# Altium PCB STM8SHEILD_LAM_LAI.PcbDoc
Units mm, origin at the board's own origin, x right, y up, seen from the top; angles counter-clockwise.
Board outline 91.95 x 45.72 mm, 2 copper layers (Top Layer, Bottom Layer); 8 components, 17 nets, 87 pads, 0 vias.
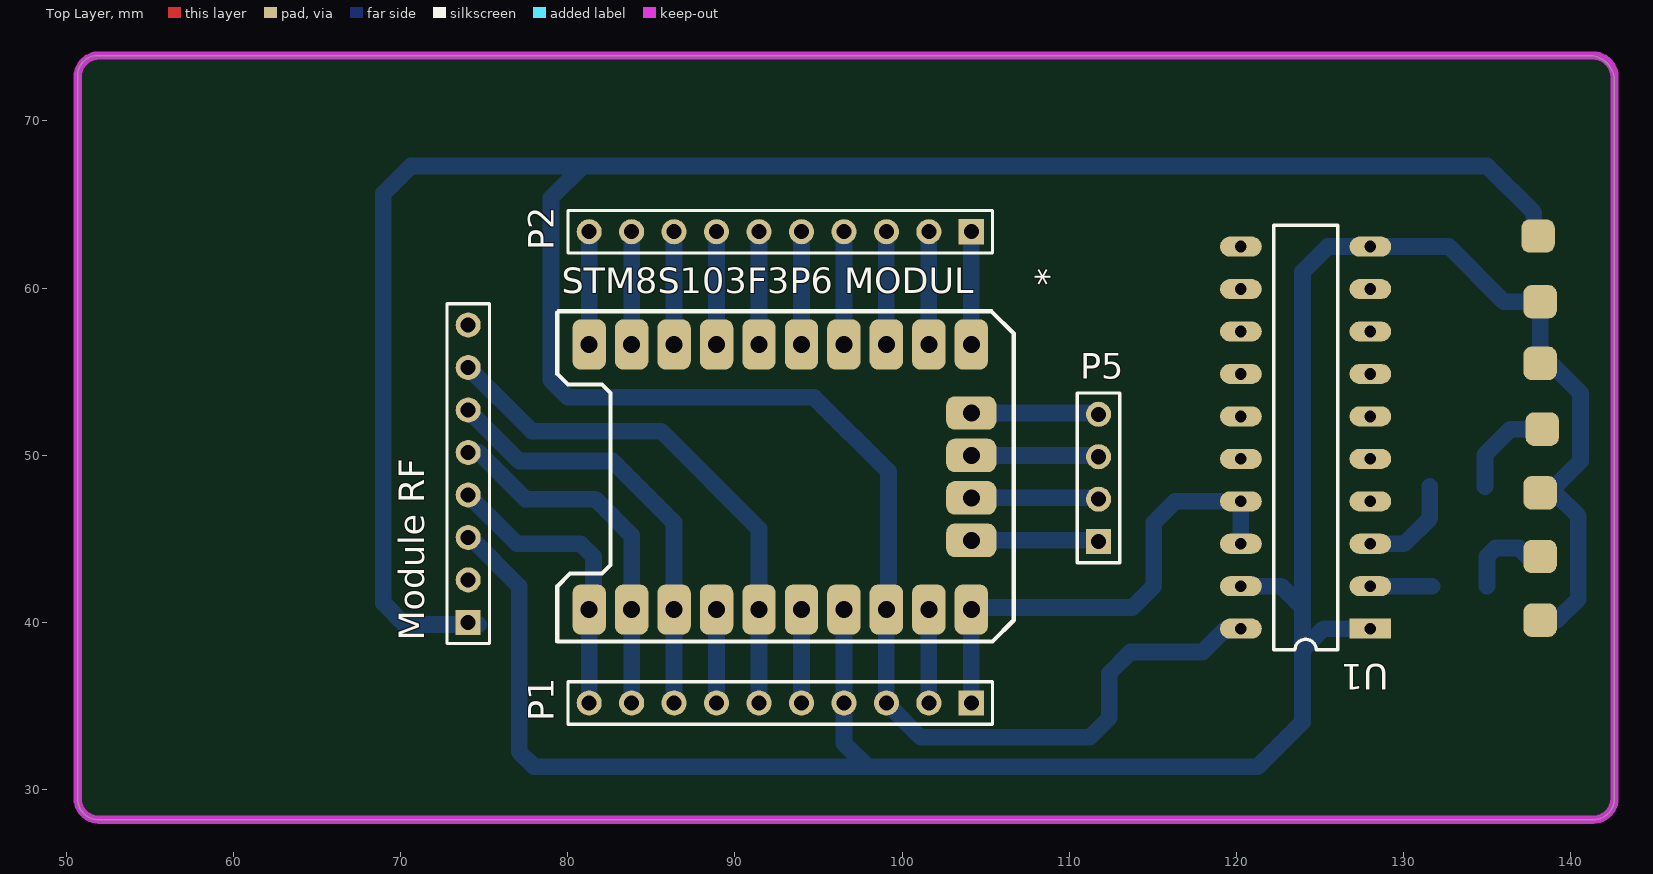
[diagram p0: Top Layer view]
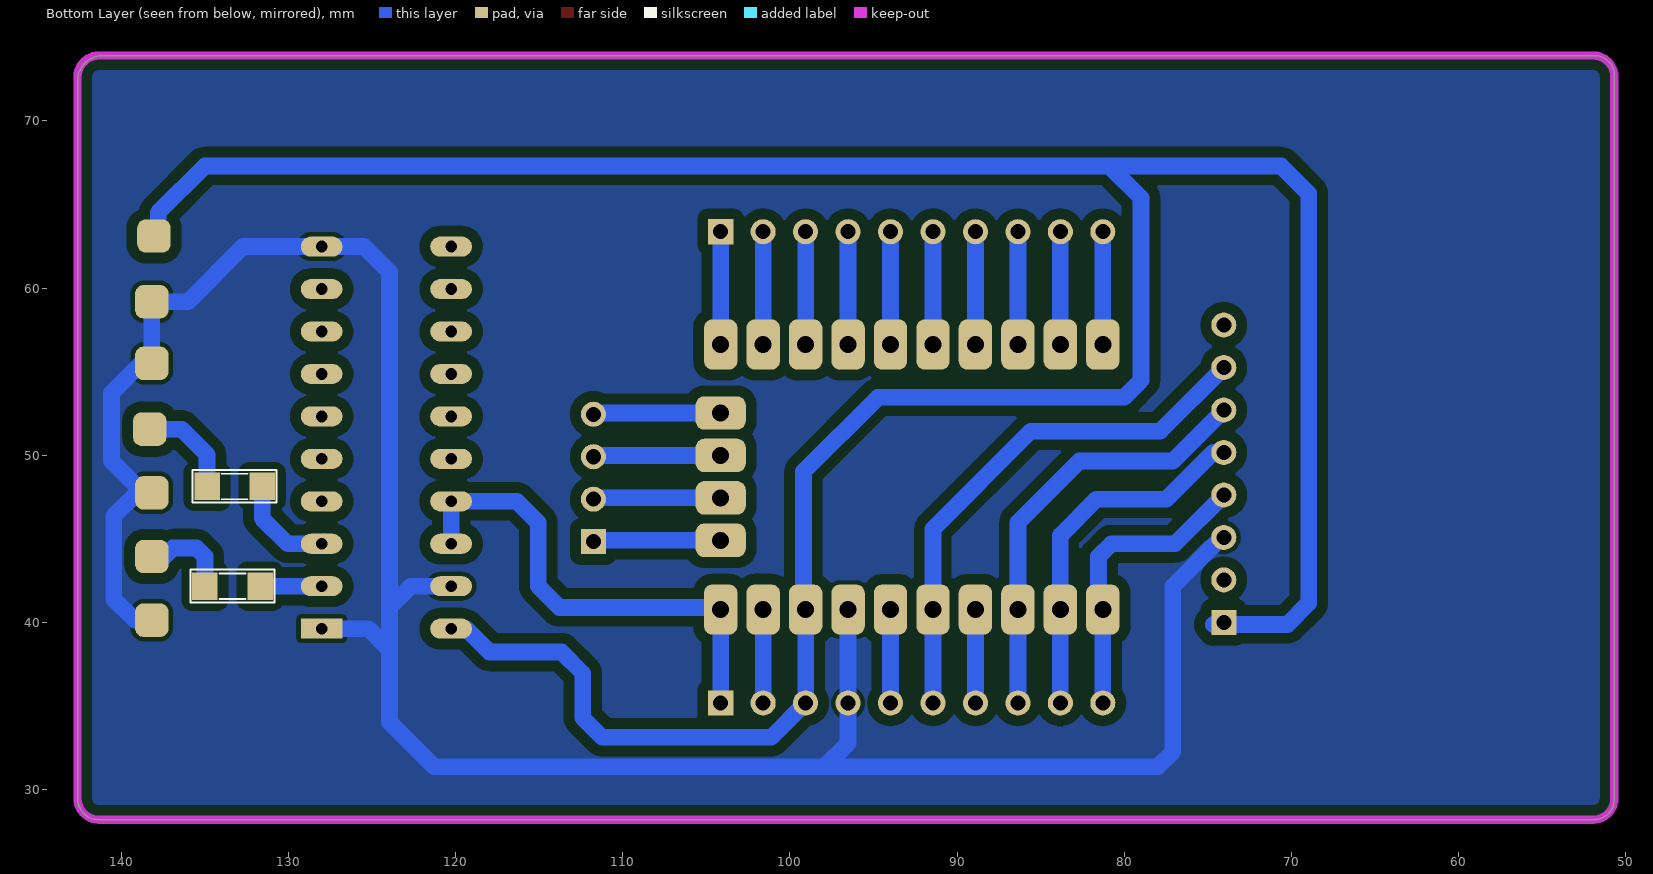
[diagram p1: Bottom Layer view, seen from below]

## Layer stack, top to bottom
Top Solder: solder mask 0.0102, Solder Resist, Dk 3.5
Top Layer: signal copper 0.0356
Dielectric 1: dielectric 0.32, FR-4, Dk 4.8
Bottom Layer: signal copper 0.0356
Bottom Solder: solder mask 0.0102, Solder Resist, Dk 3.5

## Board outline
142.621,72.39 ccw(c141.097,72.39) 141.097,73.914 51.816,73.914 ccw(c51.879,72.708) 50.673,72.644 50.673,29.591 ccw(c51.943,29.464) 51.816,28.194 141.351,28.194 ccw(c141.351,29.464) 142.621,29.464

## Design rules (kind name [scope] priority, off if disabled: settings)
Clearance [All] p1: gap=0.635 ignorepadtopadclearanceinfootprint=FALSE
PolygonConnect [All] p1: connectstyle=Relief reliefconductorwidth=0.254 reliefentries=4 polygonreliefangle="90 Angle" airgapwidth=0.254
RoutingVias [All] p1: holewidth=0.711 width=1.27 viastyle="Through Hole" minholewidth=0.711 minwidth=1.27 maxholewidth=0.711 maxwidth=1.27
ShortCircuit [All] p1: allowed=TRUE
SolderMaskExpansion [All] p1: expansion=0.102
Width [All] p1: maxlimit=1 minlimit=0.254 preferedwidth=1 toplayer_maxwidth=0.254 toplayer_prefwidth=0.254 bottomlayer_minwidth=1 minimp=50.000000 maximp=50.000000 favimp=50.000000
29 further rules are at their usual default settings.

## Classes and differential pairs
component class STM8SBOARDSHIELD: * P1 P2 P5 U1 U7

## Components (designator, comment, footprint, x,y, rotation, side; value= is the part's Value field where it differs from the comment)
* "STM" STM8S103F3P6 81.28,40.767 r0 top
"Module RF" "Comment" HDR1X8 74.041,40.005 r90 top
P1 "Header 10" HDR1X10 104.14,35.179 r180 top
P2 "Header 10" HDR1X10 104.14,63.373 r180 top
P5 "Header 4" HDR1X4 111.76,44.831 r90 top
U1 "74HC245" 74HC245 128.143,39.624 r180 top
? "Comment" SM-1206 133.223,48.133 r180 bottom
? "Comment" SM-1206 133.35,42.164 r180 bottom

## Footprints (in the part's own frame and the unit in brackets; to place one, negate y for a bottom-side part, rotate by r counter-clockwise, add the part's x,y. Pads: shape width x height; smd on the part's side, far side on the other; paste and mask are expansions set on the pad)
74HC245 [mm] "74HC245"
  rect 2.5x1.2 hole 0.7: 1(0.127,0)
  oval 2.5x1.2 hole 0.7: 2(0.127,-2.54) 3(0.127,-5.08) 4(0.127,-7.62) 5(0.127,-10.16) 6(0.127,-12.7) 7(0.127,-15.24) 8(0.127,-17.78) 9(0.127,-20.32) 10(0.127,-22.86) 11(7.874,-22.86) 12(7.874,-20.32) 13(7.874,-17.78) 14(7.874,-15.24) 15(7.874,-12.7) 16(7.874,-10.16) 17(7.874,-7.62) 18(7.874,-5.08) 19(7.874,-2.54) 20(7.874,0)
  silkscreen extent 2.08,-24.13 5.91,1.27, body extent 0.18,-24.26 7.94,1.34, height 4.5
HDR1X4 [mm] "Connector; Header; 4 Position"
  rect 1.5x1.5 hole 0.9: 1(0,0)
  round 1.5 hole 0.9: 2(2.54,0) 3(5.08,0) 4(7.62,0)
  silkscreen extent -1.27,-1.27 8.89,1.27
HDR1X8 [mm] "Connector; Header; 8 Position"
  rect 1.5x1.5 hole 0.9: 1(0,0)
  round 1.5 hole 0.9: 2(2.54,0) 3(5.08,0) 4(7.62,0) 5(10.16,0) 6(12.7,0) 7(15.24,0) 8(17.78,0)
  silkscreen extent -1.27,-1.27 19.05,1.27, body extent -1.27,-1.27 19.05,1.27, height 7
HDR1X10 [mm] "Connector; Header; 10 Position"
  rect 1.5x1.5 hole 0.9: 1(0,0)
  round 1.5 hole 0.9: 2(2.54,0) 3(5.08,0) 4(7.62,0) 5(10.16,0) 6(12.7,0) 7(15.24,0) 8(17.78,0) 9(20.32,0) 10(22.86,0)
  silkscreen extent -1.27,-1.27 24.13,1.27
SM-1206 [mil] "Compoment SMD 120x60mil"
  rect 60x65 smd: 1(-65,0) 2(65,0)
  silkscreen extent -99,-38 99,39, body extent -83,-35 83,36, height 25
STM8S103F3P6 [mm]
  rrect50% 2x3 hole 1.02: 1(0,0) 2(2.54,0) 3(5.08,0) 4(7.62,0) 5(10.16,0) 6(12.7,0) 7(15.24,0) 8(17.78,0) 9(20.32,0) 10(22.86,0) 13(22.86,15.86) 14(20.32,15.86) 15(17.78,15.86) 16(15.24,15.86) 17(12.7,15.86) 18(10.16,15.86) 19(7.62,15.86) 20(5.08,15.86) 21(2.54,15.86) 22(0,15.86)
  rrect50% 3x2 hole 1.02: 11(22.86,4.142) 12(22.86,6.682) 13(22.86,9.222) 14(22.86,11.762)
  silkscreen extent -1.91,-1.91 25.4,17.84

## Part data
*: library part Component_1
P1 P2: "Header, 10-Pin", LatestRevisionDate=17-Jul-2002, LatestRevisionNote="Re-released for DXP Platform.", Publisher="Altium Limited"
P5: "Header, 4-Pin", LatestRevisionDate=17-Jul-2002, LatestRevisionNote="Re-released for DXP Platform.", Publisher="Altium Limited"

## Free pads (board coordinates)
  rrect50% 2x2 all layers, no hole: 4(138.176,40.132) 4(138.176,47.752) 4(138.176,55.499) 4(138.176,59.182) 5(138.049,63.119) 6(138.176,43.942) 7(138.303,51.562)

## Nets (pads, with @x,y where several pads share a name; then routed paths per layer and width w, separated by ;. In a path a pad name is that pad's centre, name@x,y a point inside that pad or via, vN(x,y) a via of type N, cw(c..) or ccw(c..) an arc to the next point about the centre after c; other vN are vias at no path point)
A3: *.10 P1.1 U1.17 U1.18 | length 29.2
  Bottom Layer w1: P1.1 *.10 104.267,40.894 113.792,40.894 115.062,42.164 115.062,45.974 116.332,47.244 U1.17 U1.18
GND: "Module RF.3" *.7 P1.4 pad.4 U1.1 U1.10 U1.19 | length 148.6
  Bottom Layer w1: 74.041,45.085 74.167,45.085 77.089,42.163 77.089,32.258 77.978,31.369 97.917,31.369 ; *.7 P1.4 96.52,32.766 97.917,31.369 ; U1.19 122.682,42.164 123.952,40.894 ; U1.1 125.222,39.624 123.952,38.354 ; pad.4@138.176,40.132 139.192,40.132 140.462,41.402 140.462,46.355 139.065,47.752 pad.4@138.684,47.752 ; pad.4@138.176,47.752 pad.4@138.684,47.752 ; 97.917,31.369 121.285,31.369 123.952,34.036 123.952,38.354 ; 123.952,38.354 123.952,40.894 ; 123.952,40.894 123.952,60.96 125.476,62.484 U1.10 132.715,62.484 136.017,59.182 138.176,59.182 138.176,55.499 138.811,55.499 140.589,53.721 140.589,49.657 pad.4@138.684,47.752
NetP3_1: U1.9
NetP3_2: U1.8
NetP3_3: U1.7
NetP3_4: U1.6
NetP3_5: U1.5
NetP3_6: U1.4
NetP3_7: ?.2@131.572,48.133 U1.3 | length 6.3
  Bottom Layer w1: U1.3@127.889,44.831 U1.3 130.048,44.704 131.572,46.228 ?.2@131.572,48.133
NetP3_8: ?.2@131.699,42.164 U1.2 | length 3.7
  Bottom Layer w1: U1.2 ?.2@131.699,42.164
NetP4_3: U1.16
NetP4_4: U1.15
NetP4_5: U1.14
NetP4_6: U1.13
NetP4_7: U1.12
NetP4_8: U1.11
VCC: "Module RF.1" *.8 P1.3 pad.5 U1.20 | length 179.2
  Bottom Layer w1: 74.676,39.878 70.231,39.878 68.961,41.148 68.961,65.659 70.612,67.31 80.899,67.31 ; U1.20 119.38,39.624 117.983,38.227 113.665,38.227 112.395,36.957 112.395,34.29 111.228,33.123 101.116,33.123 P1.3 *.8 99.187,40.894 99.187,49.022 94.742,53.467 80.011,53.467 78.994,54.484 78.994,65.405 80.899,67.31 ; pad.5 137.795,63.373 137.795,64.516 135.001,67.31 80.899,67.31
pads on no net: "Module RF.2" "Module RF.4" "Module RF.5" "Module RF.6" "Module RF.7" "Module RF.8" *.1 *.2 *.3 *.4 *.5 *.6 *.9 *.11 *.12 *.13 *.14 *.15 *.16 *.17 *.18 *.19 *.20 *.21 *.22 ?.1 P1.2 P1.5 P1.6 P1.7 P1.8 P1.9 P1.10 P2.1 P2.2 P2.3 P2.4 P2.5 P2.6 P2.7 P2.8 P2.9 P2.10 P5.1 P5.2 P5.3 P5.4
copper on no net: | length 225.2
  Bottom Layer w0.5: 74.041,47.625 74.549,47.625 ; 81.153,40.513 81.153,40.64 81.534,41.021 ; 74.041,55.245 74.549,55.245 74.041,55.245
  Bottom Layer w1: 74.041,47.625 76.962,44.704 77.47,44.704 80.772,44.704 81.534,43.942 81.534,43.434 81.534,41.021 ; 74.041,50.165 74.676,50.165 77.47,47.371 81.661,47.371 83.82,45.212 83.82,40.767 83.82,34.925 ; 74.041,52.705 77.089,49.657 77.597,49.657 82.677,49.657 86.36,45.974 86.36,40.767 86.36,35.179 ; 74.041,55.245 77.851,51.435 78.359,51.435 84.582,51.435 85.598,51.435 91.44,45.593 91.44,40.767 91.44,35.179 ; 81.28,35.179 81.28,40.767 ; 81.28,56.627 81.28,63.373 ; 83.82,56.627 83.82,63.373 ; 86.36,56.627 86.36,63.373 ; 88.9,35.179 88.9,40.767 ; 88.9,56.627 88.9,63.373 ; 91.44,56.627 91.44,63.373 ; 93.98,35.179 93.98,40.767 ; 93.98,56.627 93.98,63.373 ; 96.266,40.386 96.52,40.132 ; 96.52,56.627 96.52,63.373 ; 99.06,56.627 99.06,63.373 ; 101.6,35.179 101.6,40.767 ; 101.6,56.627 101.6,63.373 ; 104.14,44.909 111.76,44.909 ; 104.14,47.449 111.76,47.449 ; 104.14,49.989 111.76,49.989 ; 104.14,52.529 111.76,52.529 ; 104.14,56.627 104.14,63.373 ; 134.874,48.133 134.874,50.038 136.398,51.562 138.303,51.562 ; 135.001,42.164 135.001,43.942 135.509,44.45 136.906,44.45 137.414,43.942

## Polygon pours and split planes (outlines as drawn)
GND on Bottom Layer "Top Layer-No Net" (solid, pour order 38): 51.816,73.787 141.605,73.787 cw(c141.605,72.771) 142.621,72.771 142.621,29.464 cw(c141.351,29.464) 141.351,28.194 51.943,28.194 cw(c51.943,29.464) 50.673,29.464 50.673,72.898 cw(c50.8,72.898) 50.8,73.025 cw(c51.689,73.025) 51.689,73.914

## Keep-outs
Keep-Out Layer:
  lines w0.5: 51.689,73.914 141.224,73.914 141.351,73.914 cw(c141.351,72.644) 142.621,72.644 142.621,29.464 cw(c141.351,29.464) 141.351,28.194 51.943,28.194 cw(c51.943,29.464) 50.673,29.464 50.673,72.644 cw(c51.943,72.644) 51.943,73.914

## Silkscreen, mask and mechanical layers (free items; w line width, h text height)
Bottom Solder:
  text "STM8SHIELD" at 108.458,70.104 h4
  text "(5V)" at 142.24,64.135 h1
  text "+" at 140.97,61.849 h1.52
  text "-" at 139.827,58.674 h1.52
  text "-" at 140.843,54.737 h1.52
  text "D1" at 141.478,51.181 h1
  text "330" at 133.096,50.038 h1
  text "-" at 140.208,47.244 h1.52
  text "D2" at 141.605,43.434 h1
  text "-" at 141.097,39.624 h1.52
  text "330" at 133.223,39.243 h1

## Text inside footprints (layer, text, board x,y; h text height)
*: Top Overlay "STM8S103F3P6 MODUL" at 79.629,59.69 h1.52